# EAGLE board cb19-gate-espboard (EAGLE 9.7.0)
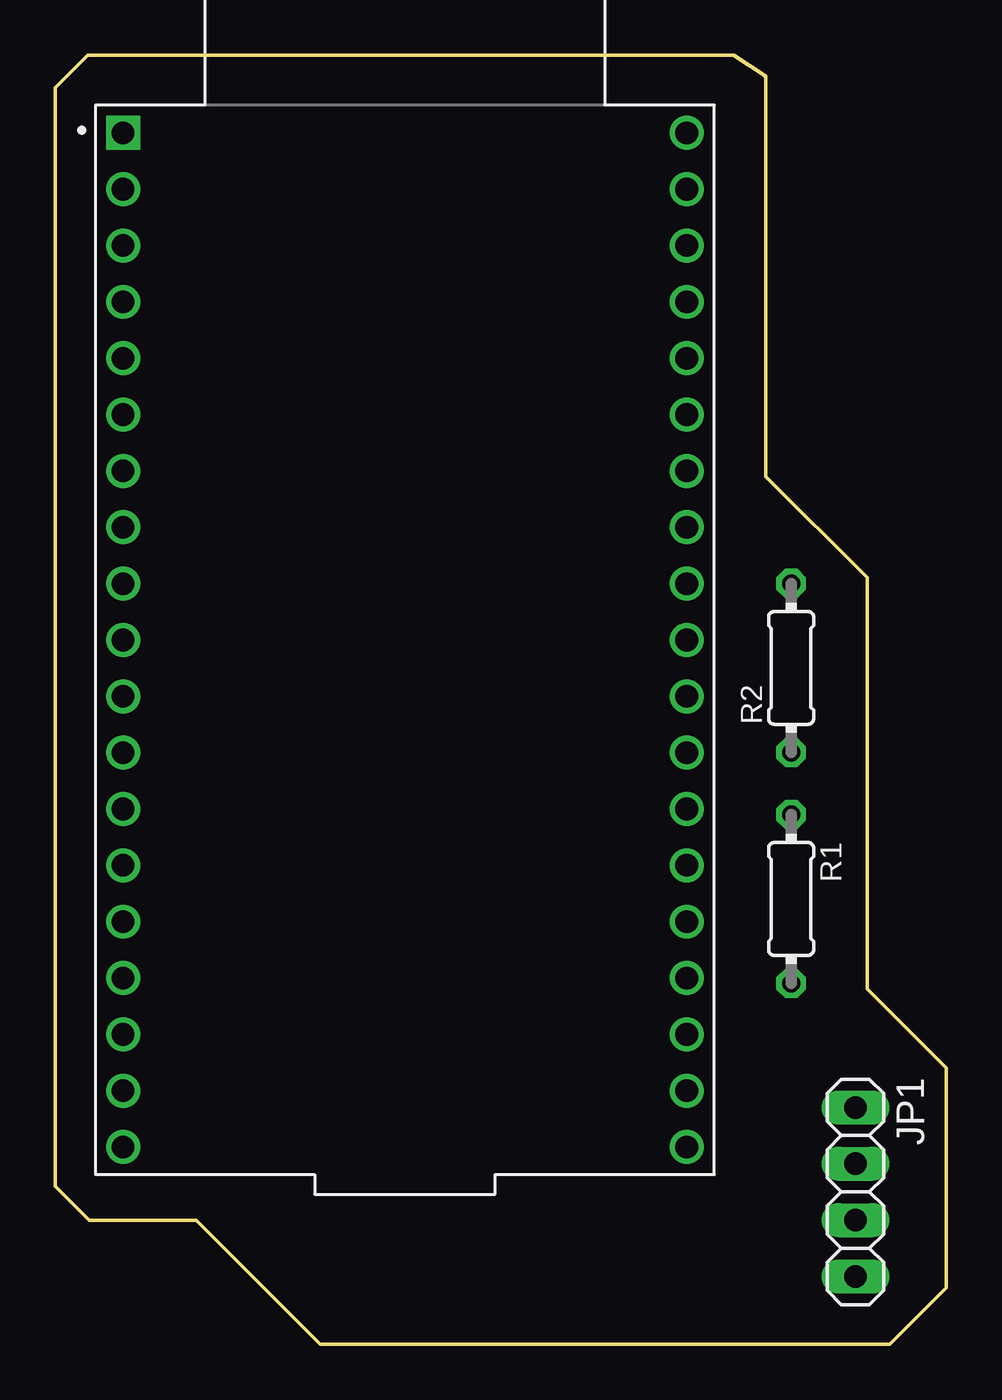
[diagram p0: board, top side]
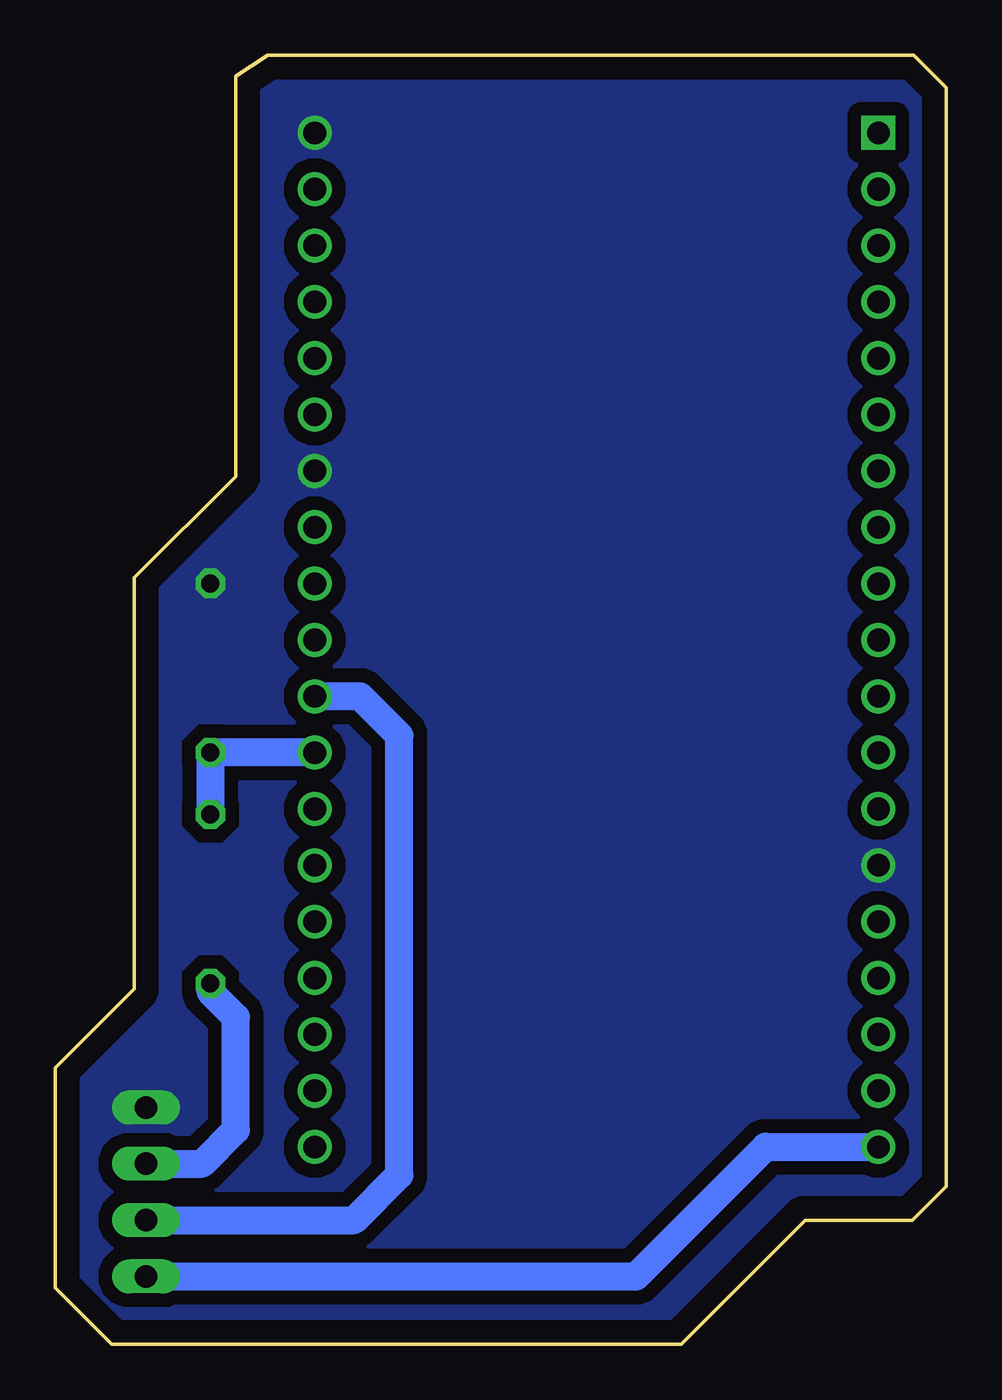
[diagram p1: board, bottom side, seen from below]

Size 40.13 x 58.09 mm. Coordinates in mm from the lower left corner, seen from the top.
Outline: 32,39.12 32,57.15 30.56,58.09 1.45,58.09 0,56.64 0,7.11 1.52,5.59 6.35,5.59 11.94,0 37.59,0 40.13,2.54 40.13,12.45 36.58,16 36.58,34.54 32,39.12
Copper layers (1*16): Top / Bottom
Stack-up Default Layer Stack: Top SilkScreen Epoxy Ink / Top SolderMask SR:Green 0.0254mm Dk 4.3 / Top Surface Finish Lead-Free 0.02mm / Top CuFoil:007 0.035mm / Dielectric-1 User Defined 1.5mm / Bottom CuFoil:007 0.035mm / Bottom Surface Finish Lead-Free 0.02mm / Bottom SolderMask SR:Green 0.0254mm Dk 4.3 / Bottom SilkScreen Epoxy Ink
Design rules: minimum copper width 6mil, minimum drill size 0.35mm, copper clearance wire_polygon to wire_polygon 6mil, copper clearance wire_polygon to pad_smd 6mil, copper clearance wire_polygon to via 6mil, copper clearance pad_smd to pad_smd 6mil, copper clearance pad_smd to via 6mil, copper clearance via to via 6mil, copper clearance smd to pad (same net) 6mil, copper clearance smd to via (same net) 6mil, copper clearance smd to smd (same net) 6mil, dimension clearance 40mil, via restrict clearance 0mil, restrict clearance 0mil, drill distance 6mil, keepout clearance 0mil

## Footprints (pad centres in the part's own frame; a part is rotated, then mirrored left to right if it is on the bottom)
1X04 = drill 1.016 long: 1 -3.81,0; 2 -1.27,0; 3 1.27,0; 4 3.81,0
0204/7 = drill 0.813 octagon: 1 -3.81,0; 2 3.81,0
MODULE_ESP32-DEVKITC = drill 1.02 square: 1 -12.7,22.85 | drill 1.02: 2 -12.7,20.31; 3 -12.7,17.77; 4 -12.7,15.23; 5 -12.7,12.69; 6 -12.7,10.15; 7 -12.7,7.61; 8 -12.7,5.07; 9 -12.7,2.53; 10 -12.7,-0.01; 11 -12.7,-2.55; 12 -12.7,-5.09; 13 -12.7,-7.63; 14 -12.7,-10.17; 15 -12.7,-12.71; 16 -12.7,-15.25; 17 -12.7,-17.79; 18 -12.7,-20.33; 19 -12.7,-22.87; 20 12.7,-22.87; 21 12.7,-20.33; 22 12.7,-17.79; 23 12.7,-15.25; 24 12.7,-12.71; 25 12.7,-10.17; 26 12.7,-7.63; 27 12.7,-5.09; 28 12.7,-2.55; 29 12.7,-0.01; 30 12.7,2.53; 31 12.7,5.07; 32 12.7,7.61; 33 12.7,10.15; 34 12.7,12.69; 35 12.7,15.23; 36 12.7,17.77; 37 12.7,20.31; 38 12.7,22.85

## Placement (x,y rotation side)
JP1  PINHD-1X4  [1X04]  36.05,6.86 270 top
R1  10k  [0204/7]  33.15,20.07 270 top
R2  18k  [0204/7]  33.15,30.48 90 top
U1  ESP32-DEVKITC  [MODULE_ESP32-DEVKITC]  15.75,31.75 0 top

## Library data of the parts
JP1 = Connector; CATEGORY: CONNECTOR; SUB-CATEGORY: PIN-HEADER
R1 R2 = eagle-ltspice; SPICEMODEL: NONE; SPICEPREFIX: R
U1 = ESP32-DEVKITC; AVAILABILITY: In Stock; CHECK_PRICES: https://www.snapeda.com/parts/ESP32-DEVKITC/Espressif+Systems/view-part/?ref=eda; DESCRIPTION: ESP32-WROOM-32UE series Transceiver; 802.11 b/g/n (Wi-Fi, WiFi, WLAN), Bluetooth ® Smart Ready 4.x Dual Mode Evaluation Board; MF: Espressif Systems; MP: ESP32-DEVKITC; PACKAGE: None; PRICE: None; SNAPEDA_LINK: https://www.snapeda.com/parts/ESP32-DEVKITC/Espressif+Systems/view-part/?ref=snap

## Nets
3V3: U1.1
CB19TX: JP1.2 R1.2
DGND: JP1.1 R2.2 U1.14 U1.32 U1.38
ESPRX: R1.1 R2.1 U1.27
ESPTX-CB19RX: JP1.3 U1.28
VCC-5V: JP1.4 U1.19

## Tracks (layer width: path | path; a pad name or v marks a point on that pad's centre or on a via)
CB19TX
  Bottom 1.27: JP1.2 33.53,8.13 32,9.65 32,14.73 33.15,15.88 R1.2
DGND
  pour Bottom (isolate 0.61, no thermals): -4.83,65.53 45.47,65.53 45.47,-2.79 -4.57,-2.79 -4.57,65.79 -4.83,65.79
ESPRX
  Bottom 1.27: R1.1 R2.1 U1.27
ESPTX-CB19RX
  Bottom 1.27: JP1.3 26.67,5.59 24.64,7.62 24.64,27.43 26.41,29.2 U1.28
VCC-5V
  Bottom 1.27: JP1.4 13.97,3.05 8.13,8.89 U1.19